# EAGLE board dmpcb (EAGLE 9.4.2)

Size 100 x 100 mm. Coordinates in mm from the lower left corner, seen from the top.
Outline: 0,0 0,100 100,100 100,0 0,0
Copper layers (1*16): Top 0.035mm / dielectric 1.5mm / Bottom 0.035mm
Design rules "default": minimum track width 6mil, minimum drill 0.35mm, track to track 6mil, track to pad 6mil, pad to pad 6mil, via to via 6mil, smd to smd 6mil, copper to edge 40mil, drill to drill 6mil, minimum pad ring 10mil, minimum via ring 8mil, stop-mask expansion 4mil, vias tented up to drill 0mil, thermal gap 10mil

## Footprints (pad centres in the part's own frame; a part is rotated, then mirrored left to right if it is on the bottom)
2POL254 = drill 1.2 long: 1 -1.27,0; 2 1.27,0
SANYO-OSCON_A' = drill 0.6 pad 1: + 0.75,0; - -0.75,0
E3,5-8 = drill 0.813 pad 1.6: + -1.778,0 | drill 0.813 pad 1.6 octagon: - 1.778,0
C0805 = smd 1.3 x 1.5: 1 -0.95,0; 2 0.95,0
PANASONIC_B = smd 2.2 x 1.4: + 1.6,0; - -1.6,0
PANASONIC_D = smd 3 x 1.4: + 2.4,0; - -2.4,0
LL-34 = smd 1.524 x 1.676: A -1.524,0; C 1.524,0
1X02_2.54_SCREWTERM = drill 1.016 square: P1 2.54,0; P2 0,0
TO252 = smd 1 x 1.6: 1 -2.28,-4.8; 2 2.28,-4.8 | smd 5.4 x 6.2: 3 0,2.5
DIL16 = drill 0.813 long: 1 -8.89,-3.81; 2 -6.35,-3.81; 3 -3.81,-3.81; 4 -1.27,-3.81; 5 1.27,-3.81; 6 3.81,-3.81; 7 6.35,-3.81; 8 8.89,-3.81; 9 8.89,3.81; 10 6.35,3.81; 11 3.81,3.81; 12 1.27,3.81; 13 -1.27,3.81; 14 -3.81,3.81; 15 -6.35,3.81; 16 -8.89,3.81
DIL24-3 = drill 0.813 long: 1 -13.97,-3.81; 2 -11.43,-3.81; 3 -8.89,-3.81; 4 -6.35,-3.81; 5 -3.81,-3.81; 6 -1.27,-3.81; 7 1.27,-3.81; 8 3.81,-3.81; 9 6.35,-3.81; 10 8.89,-3.81; 11 11.43,-3.81; 12 13.97,-3.81; 13 13.97,3.81; 14 11.43,3.81; 15 8.89,3.81; 16 6.35,3.81; 17 3.81,3.81; 18 1.27,3.81; 19 -1.27,3.81; 20 -3.81,3.81; 21 -6.35,3.81; 22 -8.89,3.81; 23 -11.43,3.81; 24 -13.97,3.81
SO08 = smd 0.6 x 2.2: 1 -1.905,-2.6; 2 -0.635,-2.6; 3 0.635,-2.6; 4 1.905,-2.6; 5 1.905,2.6; 6 0.635,2.6; 7 -0.635,2.6; 8 -1.905,2.6
1X18 = drill 1.016 pad 1.88: 1 0,0; 2 2.54,0; 3 5.08,0; 4 7.62,0; 5 10.16,0; 6 12.7,0; 7 15.24,0; 8 17.78,0; 9 20.32,0; 10 22.86,0; 11 25.4,0; 12 27.94,0; 13 30.48,0; 14 33.02,0; 15 35.56,0; 16 38.1,0; 17 40.64,0; 18 43.18,0
1X05 = drill 1.016 pad 1.88: 1 0,0; 2 2.54,0; 3 5.08,0; 4 7.62,0; 5 10.16,0
CUI_SJ-3523-SMT-TR = smd 2.2 x 2.8: 1 -1.1,-3.7; 3 0.9,3.7 | smd 2.8 x 2.8: 2 8.3,-3.7 | hole 1.7: 0,0; 7,0
1X03_LOCK_LONGPADS = drill 1.016 long: 1 0,0; 2 2.54,-0.254; 3 5.08,0
JP2 = drill 0.914 long: 1 -2.54,0; 2 0,0; 3 2.54,0
JP3Q = drill 0.914 octagon: 1 -2.54,-1.27; 2 -2.54,1.27; 3 0,-1.27; 4 0,1.27; 5 2.54,-1.27; 6 2.54,1.27
JP1 = drill 0.914 long: 1 0,-1.27; 2 0,1.27
SML0805 = smd 1.2 x 1.2: A 1.05,0; C -1.05,0
TO220BV = drill 1.016 long: D 0,-2.54; G -2.54,-2.54; S 2.54,-2.54
R0805 = smd 1.3 x 1.5: 1 -0.95,0; 2 0.95,0
PT-10 = drill 1.016 pad 1.778 octagon: 1 -2.54,-5.08; 2 2.54,-5.08; 3 0,5.08
M0805 = smd 1.3 x 1.6: 1 -0.95,0; 2 0.95,0
RJ9W = drill 0.813 long: A 2.54,0.635; E -2.54,0.635; S 0,0.635
B3F-10XX = drill 1.016 long: 1 -3.251,2.261; 2 3.251,2.261; 3 -3.251,-2.261; 4 3.251,-2.261
TEENSY_3.0-3.2_ALL_PINS_&_PADS = drill 0.965: 0 -7.62,13.97; 1 -7.62,11.43; 2 -7.62,8.89; 3 -7.62,6.35; 3.3V 7.62,11.43; 3.3V1 -2.54,-16.51; 3.3V2 2.54,-1.27; 4 -7.62,3.81; 5 -7.62,1.27; 6 -7.62,-1.27; 7 -7.62,-3.81; 8 -7.62,-6.35; 9 -7.62,-8.89; 10 -7.62,-11.43; 11 -7.62,-13.97; 12 -7.62,-16.51; 13 7.62,-16.51; 14/A0 7.62,-13.97; 15/A1 7.62,-11.43; 16/A2 7.62,-8.89; 17/A3 7.62,-6.35; 18/A4 7.62,-3.81; 19/A5 7.62,-1.27; 20/A6 7.62,1.27; 21/A7 7.62,3.81; 22/A8 7.62,6.35; 23/A9 7.62,8.89; 24 0,-3.81; 25 0,-6.35; 26 0,-8.89; 27 0,-11.43; 28 0,-13.97; 29 2.54,-13.97; 30 2.54,-11.43; 31 2.54,-8.89; 32 2.54,-6.35; 33 2.54,-3.81; A10 5.08,6.35; A11 5.08,3.81; A12 0,1.27; A13 2.54,1.27; AGND 7.62,13.97; AREF 5.08,8.89; GND -7.62,16.51; GND1 0,-16.51; GND2 0,-1.27; PGM 2.54,-16.51; RESET/DAC 5.08,-16.51; VBAT -5.08,-16.51; VIN 7.62,16.51; VUSB 5.08,13.97
POLOLU-DRV8825 = drill 0.8 pad 1.676: A1 6.35,-1.27; A2 6.35,-3.81; B1 6.35,1.27; B2 6.35,3.81; DIR -6.35,-8.89; EN_N -6.35,8.89; FLT_N 6.35,-6.35; M0 -6.35,6.35; M1 -6.35,3.81; M2 -6.35,1.27; RST_N -6.35,-1.27; SLP_N -6.35,-3.81; STEP_N -6.35,-6.35; VMOT 6.35,8.89 | drill 0.8 pad 1.676 square: GND 6.35,-8.89; GND2 6.35,6.35

## Placement (x,y rotation side)
AKL_PWR  [2POL254]  -44.45,80.01 0 top  (outside the outline)
C1  0.33uF  [SANYO-OSCON_A']  -17.78,73.66 0 top  (outside the outline)
C2  0.1uF  [SANYO-OSCON_A']  -49.53,73.66 0 top  (outside the outline)
C3  1000uf  [E3,5-8]  11.43,16.51 0 top
C4  100nf  [C0805]  -83.82,-30.48 0 top  (outside the outline)
C5  100nf  [C0805]  -43.18,73.66 0 top  (outside the outline)
C6  10uf  [PANASONIC_B]  -41.91,66.04 0 top  (outside the outline)
C7  100uf  [PANASONIC_D]  -66.04,110.49 270 top  (outside the outline)
C8  100uf  [PANASONIC_B]  -100.33,-38.1 0 top  (outside the outline)
C9  100uf  [PANASONIC_B]  -107.95,-38.1 0 top  (outside the outline)
C10  100nf  [C0805]  -107.95,-87.63 0 top  (outside the outline)
D1  1N4148  [LL-34]  -50.8,80.01 0 top  (outside the outline)
D2  1N4148  [LL-34]  -57.15,80.01 0 top  (outside the outline)
DCMOTOR  [1X02_2.54_SCREWTERM]  96.52,46.99 270 top
IC1  7805DT  [TO252]  22.86,10.16 0 top
IC2  L293D  [DIL16]  81.28,24.13 90 top
IC3  MAX7219CNG  [DIL24-3]  -38.1,40.64 0 top  (outside the outline)
IC4  LM358D  [SO08]  6.35,107.95 0 top  (outside the outline)
IC5  LM358D  [SO08]  -91.44,-29.21 0 top  (outside the outline)
J1  [1X18]  36.83,2.54 90 top
J2  [1X18]  34.29,2.54 90 top
J3  [1X18]  62.23,2.54 90 top
J4  [1X18]  64.77,2.54 90 top
J5  [1X05]  44.45,72.39 0 top
J6  [1X05]  44.45,49.53 0 top
J7  SJ-3523-SMT-TR  [CUI_SJ-3523-SMT-TR]  -104.14,-50.8 0 top  (outside the outline)
J8  [1X03_LOCK_LONGPADS]  -107.95,-93.98 0 top  (outside the outline)
JP1  [JP2]  -49.53,66.04 0 top  (outside the outline)
JP2  [JP2]  -58.42,66.04 0 top  (outside the outline)
JP3  [JP3Q]  -17.78,57.15 0 top  (outside the outline)
JP4  [JP2]  -52.07,124.46 270 top  (outside the outline)
JP5  [JP2]  -78.74,40.64 0 top  (outside the outline)
JP6  [JP2]  -82.55,52.07 0 top  (outside the outline)
JP7  [JP1]  11.43,6.35 0 top
LED1  [SML0805]  -63.5,78.74 0 top  (outside the outline)
Q1  IRF530  [TO220BV]  20.32,58.42 0 top
Q2  IRF530  [TO220BV]  7.62,58.42 0 top
R1  100k  [R0805]  -24.13,73.66 0 top  (outside the outline)
R2  1k  [R0805]  -25.4,80.01 0 top  (outside the outline)
R3  100k  [R0805]  -30.48,73.66 0 top  (outside the outline)
R4  220  [R0805]  -55.88,73.66 0 top  (outside the outline)
R5  100k  [R0805]  -36.83,73.66 0 top  (outside the outline)
R6  1k  [R0805]  -30.48,80.01 0 top  (outside the outline)
R7  b10k  [PT-10]  85.09,87.63 0 top
R8  b10k  [PT-10]  12.7,87.63 0 top
R9  1M  [M0805]  -35.56,80.01 0 top  (outside the outline)
R10  10M  [M0805]  -60.96,73.66 0 top  (outside the outline)
R11  10K  [M0805]  -20.32,80.01 0 top  (outside the outline)
R12  10k  [M0805]  -66.04,73.66 0 top  (outside the outline)
R13  10k  [M0805]  -71.12,73.66 0 top  (outside the outline)
R14  10k  [M0805]  -15.24,80.01 0 top  (outside the outline)
R15  b100k  [RJ9W]  -81.28,-5.08 0 top  (outside the outline)
R16  10K  [M0805]  -59.69,35.56 0 top  (outside the outline)
R17  b10k  [RJ9W]  -81.28,-15.24 0 top  (outside the outline)
R18  270R  [M0805]  -83.82,-24.13 0 top  (outside the outline)
R19  b10k  [RJ9W]  -90.17,-38.1 0 top  (outside the outline)
S1  [B3F-10XX]  72.39,87.63 90 top
S2  [B3F-10XX]  25.4,87.63 90 top
SENSOR  [1X02_2.54_SCREWTERM]  96.52,53.34 270 top
SWITCHLOAD  [1X02_2.54_SCREWTERM]  96.52,59.69 270 top
SWITCHLOAD1  [1X02_2.54_SCREWTERM]  96.52,40.64 270 top
U$1  TEENSY_3.1-3.2_ALL_PINS&PADS  [TEENSY_3.0-3.2_ALL_PINS_&_PADS]  49.8,19.05 180 top
U$2  POLOLU-DRV8825  [POLOLU-DRV8825]  80.01,62.23 180 top

## Library data of the parts
AKL_PWR = con-phoenix-254; OC_FARNELL: unknown; OC_NEWARK: unknown
C1-C10 = rcl; SPICEPREFIX: C
D1 D2 = Seeed-Diode; MPN: 1N4148
DCMOTOR J1-J6 J8 SENSOR SWITCHLOAD SWITCHLOAD1 = SparkFun-Connectors
IC1 IC4 IC5 = linear
IC2 = st-microelectronics; MPN: L293D; OC_FARNELL: 9589619; OC_NEWARK: 56P8249
IC3 = maxim; MF: MAXIM; MPN: MAX7219CNG; OC_FARNELL: 1523914; OC_NEWARK: 34C4018
J7 = SJ-3523-SMT-TR; MF: CUI Inc; STANDARD: Manufacturer recommendations
JP1-JP7 = jumper
LED1 = led
Q1 Q2 = transistor-power
R1 R2 R5 R6 = resistor
R3 R4 R9-R14 R16 R18 = rcl; SPICEPREFIX: R
R7 R8 = rcl; SPICEMODEL: POT; SPICEPREFIX: X
R15 R17 R19 = pot
S1 S2 = switch-omron; MPN: B3F-1000; OC_FARNELL: 176432; OC_NEWARK: 36M3542
U$1 = Teensy_3_and_LC_Series_Boards_v1.4
U$2 = alvarop-lib

## Nets
3.3V: R7.1 R8.1 U$1.3.3V U$1.3.3V1 U$1.3.3V2
+5V: C2.+ C5.1 C6.+ C10.2 IC1.2 IC2.16 IC3.19 IC4.8 IC5.8 J5.5 JP4.3 JP5.3 JP6.3 JP7.2 LED1.A R14.2 SENSOR.P2 U$1.VIN
A1: U$2.A1
A2: U$2.A2
AGND: U$1.AGND
AREF: U$1.AREF
B1: U$2.B1
B2: U$2.B2
BETTERAUDIOOUT: J4.14 R17.E
BUTTON01: J1.1 R12.2 S1.3 S1.4
BUTTON02: J1.2 R13.2 S2.3 S2.4
D: JP1.2 JP2.2 Q1.D Q2.D SWITCHLOAD1.P1 SWITCHLOAD.P1
DNC: U$2.FLT_N
DRV8825DIR: J1.10 U$2.DIR
DRV8825EN: J1.9 U$2.EN_N
DRV8825RST: J1.12 U$2.RST_N
DRV8825SLP: J1.13 U$2.SLP_N
DRV8825STEP: J1.11 U$2.STEP_N
G: Q1.G Q2.G R1.1 R2.2 R5.1 R6.2
GND: AKL_PWR.2 C1.- C2.- C4.2 C5.2 C6.- C7.- C10.1 IC1.3 IC2.4 IC2.5 IC2.12 IC2.13 IC3.4 IC3.9 IC4.4 IC5.4 J5.4 J6.1 J6.2 J6.3 J6.4 J6.5 J7.1 JP3.2 JP3.4 JP3.6 JP4.1 JP5.1 JP6.1 R3.2 R4.1 R7.2 R8.2 R12.1 R13.1 R16.2 R19.A U$1.GND U$1.GND1 U$1.GND2 U$2.GND U$2.GND2
LM293EN: IC2.1 J1.3
LM293IN01: IC2.2 J1.4
LM293IN02: IC2.7 J1.5
MAX7219CLK: IC3.13 J1.7 J5.1
MAX7219DIN: IC3.1 J1.6 J5.3
MAX7219LOAD: IC3.12 J1.8 J5.2
MOSFET01: J4.16 R2.1
MOSFET02: J4.15 R6.1
N$5: DCMOTOR.P2 IC2.3
N$6: DCMOTOR.P1 IC2.6
N$8: C3.- R3.1
N$9: LED1.C R4.2
N$11: D2.A JP2.3
N$12: D1.A JP1.3
N$16: JP3.5 R10.1
N$17: JP3.3 R9.1
N$18: JP3.1 R11.1
N$19: S1.1 S1.2
N$20: IC4.5 J8.3
N$21: S2.1 S2.2
N$22: J2.1 U$1.24
N$23: J2.2 U$1.23/A9
N$25: IC3.18 R14.1
N$26: J2.3 U$1.22/A8
N$27: J2.4 U$1.21/A7
N$28: J2.5 U$1.20/A6
N$29: J2.6 U$1.19/A5
N$30: J2.7 U$1.18/A4
N$31: J2.8 U$1.17/A3
N$32: J2.9 U$1.16/A2
N$33: J2.10 U$1.15/A1
N$34: J2.11 U$1.14/A0
N$35: J2.12 U$1.13
N$36: J2.13 U$1.12
N$37: J2.14 U$1.11
N$38: J2.15 U$1.10
N$39: J2.16 U$1.9
N$40: J2.17 U$1.8
N$41: J2.18 U$1.7
N$42: J3.18 U$1.25
N$43: J3.17 U$1.26
N$44: J3.16 U$1.27
N$45: J3.15 U$1.28
N$46: J3.14 U$1.29
N$47: J3.13 U$1.30
N$48: J3.12 U$1.31
N$49: J3.11 U$1.32
N$50: J3.10 U$1.33
N$51: J3.9 U$1.A10
N$52: J3.8 U$1.A11
N$53: J3.7 U$1.A12
N$54: J3.6 U$1.A13
N$55: J3.5 U$1.RESET/DAC
N$56: J4.17
N$57: JP4.2 U$2.M2
N$58: JP5.2 U$2.M1
N$59: JP6.2 U$2.M0
N$61: U$1.1
N$62: U$1.0
N$63: IC4.2 R15.A R16.1
N$64: J1.14
N$66: C8.+ J7.2
N$67: R17.A R17.S R18.2
N$68: C4.1 IC5.3 R18.1
N$69: IC5.1 IC5.2 R19.E
N$70: IC4.6 J8.2
N$71: IC5.5 R19.S
N$72: C8.- C9.- IC5.6 IC5.7
N$73: C9.+ J7.3
N$75: IC4.7 J8.1
OPAMPIN: IC4.3
OPAMPOUT: IC4.1 J4.10 R15.E R15.S
PIN2: U$1.2
PIN3: J3.1 U$1.3
PIN4: J3.2 U$1.4
PIN5: J3.3 U$1.5
PIN6: J3.4 U$1.6
POT01: J4.13 R7.3
POT02: J4.12 R8.3
S: Q1.S Q2.S R1.2 R5.2
SENSORPORT: J4.11 J4.18 R9.2 R10.2 R11.2 SENSOR.P1
V+: AKL_PWR.1 C1.+ C3.+ D1.C D2.C IC1.1 IC2.8 JP1.1 JP2.1 JP7.1 SWITCHLOAD1.P2 SWITCHLOAD.P2
VBAT: U$1.VBAT
VMOT: C7.+ U$2.VMOT
VUSB: U$1.VUSB

## Tracks (layer width: path | path; a pad name or v marks a point on that pad's centre or on a via)
3.3V  (4 unrouted)
+5V  (17 unrouted)
BETTERAUDIOOUT  (1 unrouted)
BUTTON01  (3 unrouted)
BUTTON02  (3 unrouted)
D  (5 unrouted)
DRV8825DIR  (1 unrouted)
DRV8825EN  (1 unrouted)
DRV8825RST  (1 unrouted)
DRV8825SLP  (1 unrouted)
DRV8825STEP  (1 unrouted)
G  (5 unrouted)
GND  (42 unrouted)
LM293EN  (1 unrouted)
LM293IN01  (1 unrouted)
LM293IN02  (1 unrouted)
MAX7219CLK  (2 unrouted)
MAX7219DIN  (2 unrouted)
MAX7219LOAD  (2 unrouted)
MOSFET01  (1 unrouted)
MOSFET02  (1 unrouted)
N$5  (1 unrouted)
N$6  (1 unrouted)
N$8  (1 unrouted)
N$9  (1 unrouted)
N$11  (1 unrouted)
N$12  (1 unrouted)
N$16  (1 unrouted)
N$17  (1 unrouted)
N$18  (1 unrouted)
N$19  (1 unrouted)
N$20  (1 unrouted)
N$21  (1 unrouted)
N$22  (1 unrouted)
N$23  (1 unrouted)
N$25  (1 unrouted)
N$26  (1 unrouted)
N$27  (1 unrouted)
N$28  (1 unrouted)
N$29  (1 unrouted)
N$30  (1 unrouted)
N$31  (1 unrouted)
N$32  (1 unrouted)
N$33  (1 unrouted)
N$34  (1 unrouted)
N$35  (1 unrouted)
N$36  (1 unrouted)
N$37  (1 unrouted)
N$38  (1 unrouted)
N$39  (1 unrouted)
N$40  (1 unrouted)
N$41  (1 unrouted)
N$42  (1 unrouted)
N$43  (1 unrouted)
N$44  (1 unrouted)
N$45  (1 unrouted)
N$46  (1 unrouted)
N$47  (1 unrouted)
N$48  (1 unrouted)
N$49  (1 unrouted)
N$50  (1 unrouted)
N$51  (1 unrouted)
N$52  (1 unrouted)
N$53  (1 unrouted)
N$54  (1 unrouted)
N$55  (1 unrouted)
N$57  (1 unrouted)
N$58  (1 unrouted)
N$59  (1 unrouted)
N$63  (2 unrouted)
N$66  (1 unrouted)
N$67  (2 unrouted)
N$68  (2 unrouted)
N$69  (2 unrouted)
N$70  (1 unrouted)
N$71  (1 unrouted)
N$72  (3 unrouted)
N$73  (1 unrouted)
N$75  (1 unrouted)
OPAMPOUT  (3 unrouted)
PIN3  (1 unrouted)
PIN4  (1 unrouted)
PIN5  (1 unrouted)
PIN6  (1 unrouted)
POT01  (1 unrouted)
POT02  (1 unrouted)
S  (3 unrouted)
SENSORPORT  (5 unrouted)
V+  (11 unrouted)
VMOT  (1 unrouted)